# EAGLE board amp_soha (EAGLE 6.4)
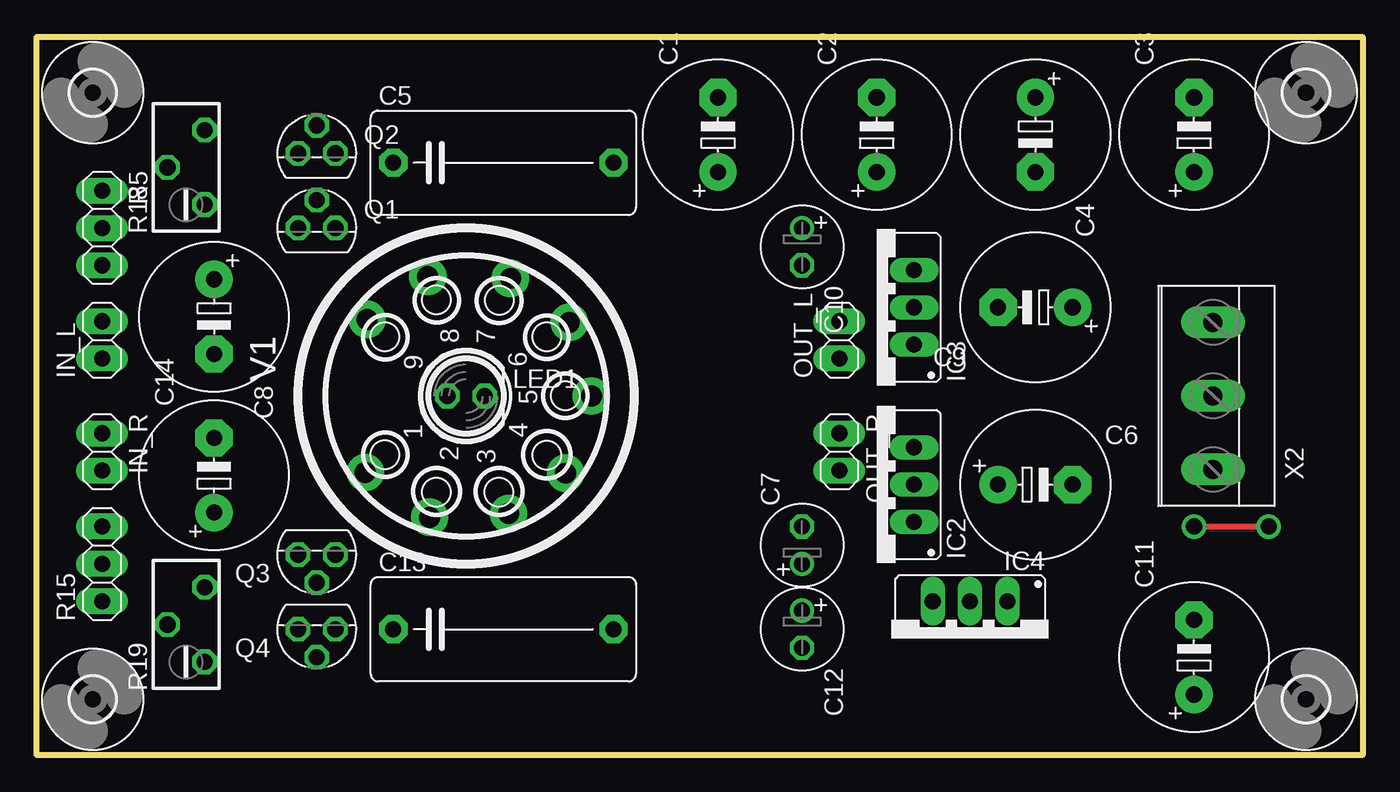
[diagram p0: board, top side]
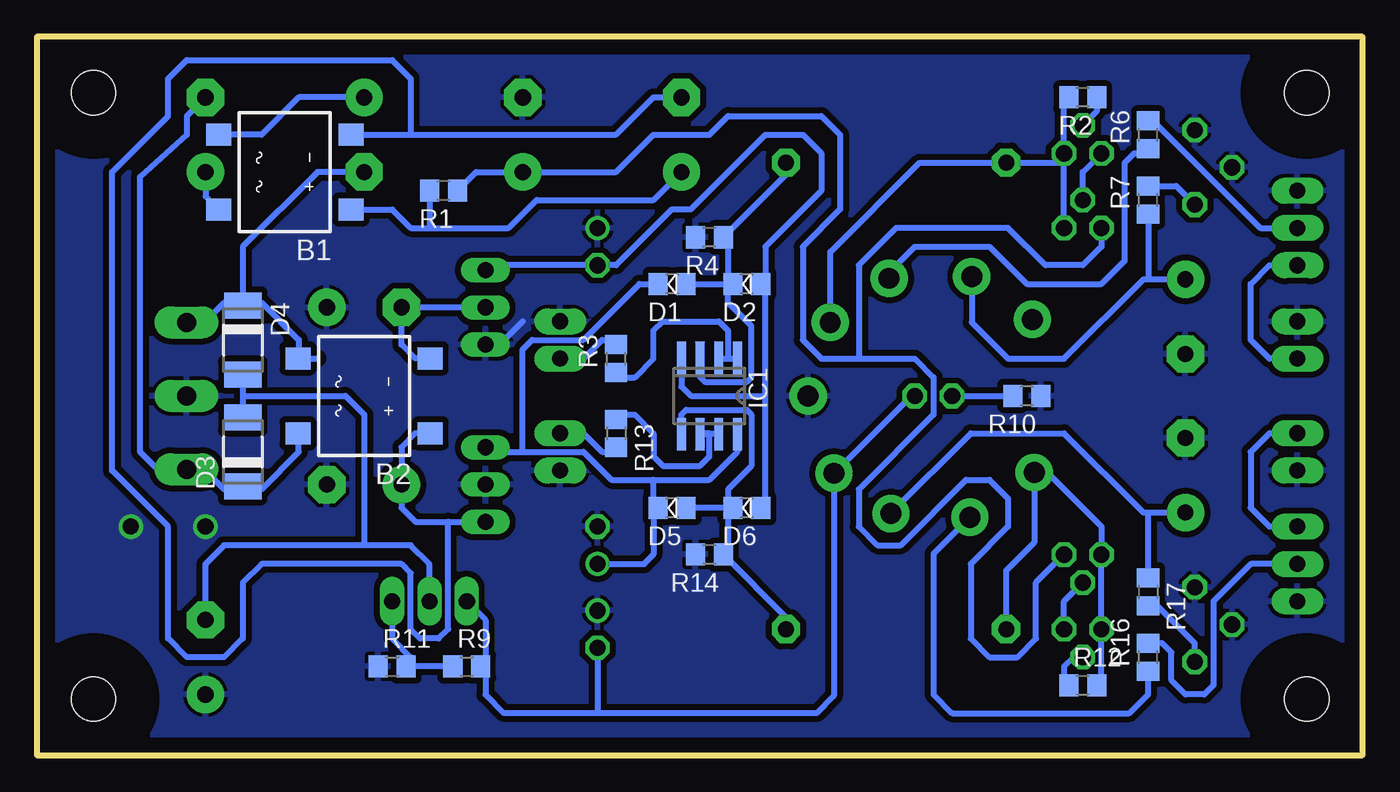
[diagram p1: board, bottom side, seen from below]

Size 90.22 x 48.89 mm. Coordinates in mm from the lower left corner, seen from the top.
Outline: 0,0 0,48.89 90.22,48.89 90.22,0 0,0
Copper layers (1*16): Top 0.035mm / dielectric 1.5mm / Bottom 0.035mm
Design rules "default": minimum track width 10mil, minimum drill 24mil, track to track 8mil, track to pad 8mil, pad to pad 8mil, via to via 8mil, smd to smd 8mil, copper to edge 40mil, drill to drill 8mil, minimum pad ring 10mil, minimum via ring 8mil, stop-mask expansion 4mil, vias tented up to drill 0mil, thermal gap 10mil

## Footprints (pad centres in the part's own frame; a part is rotated, then mirrored left to right if it is on the bottom)
DFS = smd 1.5 x 1.7: + -2.55,-4.5; - 2.55,-4.5; AC1 -2.55,4.5; AC2 2.55,4.5
E5-10,5 = drill 1.1 pad 2.54: + -2.54,0 | drill 1.1 pad 2.54 octagon: - 2.54,0
C150-072X183 = drill 1.1 pad 1.93 octagon: 1 -7.493,0; 2 7.493,0
E2,5-6 = drill 1.1: + -1.27,0 | drill 1.1 pad 1.6 octagon: - 1.27,0
D0805 = smd 1.3 x 1.5: A -0.95,0; K 0.95,0
DO-214AC = smd 1.778 x 2.54: A 2.342,0; C -2.342,0
SO08 = smd 0.6 x 2.2: 1 -1.905,-2.6; 2 -0.635,-2.6; 3 0.635,-2.6; 4 1.905,-2.6; 5 1.905,2.6; 6 0.635,2.6; 7 -0.635,2.6; 8 -1.905,2.6
78XXS = drill 1.1 pad 1.676 long: GND 0,-2.54; IN -2.54,-2.54; OUT 2.54,-2.54
79XXS = drill 1.1 pad 1.676 long: GND -2.54,-2.54; IN 0,-2.54; OUT 2.54,-2.54
337TS = drill 1.1 pad 1.676 long: 1 -2.54,-2.54; 2 0,-2.54; 3 2.54,-2.54
1X02 = drill 1.1 pad 1.778 long: 1 -1.27,0; 2 1.27,0
LED5MM = drill 1.1 pad 1.676 octagon: A -1.27,0; K 1.27,0
TO92 = drill 1.1 pad 1.676 octagon: 1 1.27,0; 2 0,1.905; 3 -1.27,0
R0805 = smd 1.3 x 1.5: 1 -0.95,0; 2 0.95,0
1X03 = drill 1.1 pad 1.778 long: 1 -2.54,0; 2 0,0; 3 2.54,0
RTRIM3296Y = drill 1.1 pad 1.676 octagon: 1 1.27,-2.54; 2 -1.27,0; 3 1.27,2.54
3,0 = hole 3: 0,0
NOVAL = drill 1.422 pad 2.54: 1 5.207,-6.858; 2 8.254,-2.484; 3 8.004,2.893; 4 5.258,6.77; 5 0,8.524; 6 -5.004,7.024; 7 -8.004,3.02; 8 -8.127,-2.611; 9 -5.207,-6.731
W237-103 = drill 1.3 pad 2.184 long: 1 -5,-1.29; 2 0,-1.29; 3 5,-1.29

## Placement (x,y rotation side)
B1  DF01S  [DFS]  73.34,39.69 90 bottom
B2  DF01S  [DFS]  67.94,24.45 90 bottom
C1  100uF/100V  [E5-10,5]  46.35,42.23 90 top
C2  100uF/100V  [E5-10,5]  57.15,42.23 90 top
C3  100uF/100V  [E5-10,5]  78.74,42.23 90 top
C4  100uF/100V  [E5-10,5]  67.94,42.23 270 top
C5  1uF/100V  [C150-072X183]  31.75,40.32 0 top
C6  470uF/35V  [E5-10,5]  67.94,18.41 0 top
C7  47uF/16V  [E2,5-6]  52.07,14.29 90 top
C8  1000uF/10V  [E5-10,5]  12.06,29.84 270 top
C9  470uF/35V  [E5-10,5]  67.94,30.48 180 top
C10  47uF/16V  [E2,5-6]  52.07,34.61 270 top
C11  470uF/35V  [E5-10,5]  78.74,6.67 90 top
C12  47uF/16V  [E2,5-6]  52.07,8.57 270 top
C13  1uF/100V  [C150-072X183]  31.75,8.57 0 top
C14  1000uF/10V  [E5-10,5]  12.06,19.05 90 top
D1  1N4148  [D0805]  46.99,32.07 180 bottom
D2  1N4148  [D0805]  41.91,32.07 180 bottom
D3  ES1  [DO-214AC]  76.2,20.64 90 bottom
D4  ES1  [DO-214AC]  76.2,28.26 270 bottom
D5  1N4148  [D0805]  46.99,16.83 180 bottom
D6  1N4148  [D0805]  41.91,16.83 180 bottom
IC1  NE5535U  [SO08]  44.45,24.45 180 bottom
IC2  7812  [78XXS]  57.15,18.41 90 top
IC3  7912  [79XXS]  57.15,30.48 90 top
IC4  [337TS]  63.5,7.94 180 top
IN_L  [1X02]  4.45,28.26 90 top
IN_R  [1X02]  4.45,20.64 270 top
LED1  [LED5MM]  29.21,24.45 0 top
OUT_L  [1X02]  54.61,28.26 90 top
OUT_R  [1X02]  54.61,20.64 270 top
Q1  J113  [TO92]  19.05,35.88 0 top
Q2  J113  [TO92]  19.05,40.96 0 top
Q3  J113  [TO92]  19.05,13.65 180 top
Q4  J113  [TO92]  19.05,8.57 180 top
R1  2k2  [R0805]  62.55,38.42 180 bottom
R2  360  [R0805]  19.05,44.77 180 bottom
R3  150  [R0805]  50.8,26.99 90 bottom
R4  100k  [R0805]  44.45,35.24 180 bottom
R5  100k  [1X03]  4.45,35.88 270 top
R6  300  [R0805]  14.61,42.23 90 bottom
R7  560  [R0805]  14.61,37.78 90 bottom
R9  1k3  [R0805]  60.96,6.03 0 bottom
R10  [R0805]  22.86,24.45 180 bottom
R11  11k  [R0805]  66.04,6.03 0 bottom
R12  360  [R0805]  19.05,4.76 0 bottom
R13  150  [R0805]  50.8,21.91 270 bottom
R14  100k  [R0805]  44.45,13.65 180 bottom
R15  100k  [1X03]  4.45,13.02 90 top
R16  300  [R0805]  14.61,6.67 90 bottom
R17  560  [R0805]  14.61,11.11 270 bottom
R18  [RTRIM3296Y]  10.16,40.01 0 top
R19  [RTRIM3296Y]  10.16,8.89 0 top
U$1  [3,0]  3.81,3.81 0 top
U$2  [3,0]  3.81,45.09 0 top
U$3  [3,0]  86.36,3.81 0 top
U$4  [3,0]  86.36,45.09 0 top
V1  [NOVAL]  29.21,24.45 270 top
X2  [W237-103]  78.74,24.45 90 top

## Library data of the parts
B1 B2 C1-C14 D1-D6 IC1-IC4 IN_L IN_R LED1 OUT_L OUT_R Q1-Q4 R1-R7 R9-R19 U$1-U$4 V1 X2 = amp_soha

## Nets
+12V: C7.+ D1.K D5.K IC1.8 IC2.OUT
+24V: C2.+ Q1.3 Q3.3 R1.1
-12.6V: C12.- IC4.3 LED1.K R9.2 V1.4
-12V: C10.- D2.A D6.A IC1.4 IC3.OUT
AGND: C2.- C6.- C7.- C8.- C9.+ C10.+ C11.+ C12.+ C14.- IC2.GND IC3.GND IN_L.2 IN_R.2 OUT_L.2 OUT_R.2 R4.2 R5.1 R10.1 R11.1 R14.2 R15.1 R18.2 R18.3 R19.2 R19.3 V1.5 X2.2
N$1: B2.AC1 C3.- D3.C X2.1
N$2: B2.AC2 C4.- D4.C X2.3
N$3: C11.- D3.A D4.A IC4.2
N$4: IC4.1 R9.1 R11.2
N$5: B2.- C9.- IC3.IN
N$6: B1.- B2.+ C1.- C6.+ IC2.IN
N$7: LED1.A R10.2
N$8: B1.AC1 C3.+
N$9: B1.AC2 C4.+
N$10: R16.1 V1.2
N$11: B1.+ C1.+ R1.2
N$12: IN_L.1 R5.3
N$13: R5.2 R6.2
N$14: R6.1 V1.7
N$15: C8.+ R7.1 V1.8
N$16: Q2.2 R2.1
N$17: R7.2 R18.1
N$18: R17.2 R19.1
N$19: C5.1 Q1.1 Q2.1 R2.2 V1.6
N$20: Q1.2 Q2.3
N$22: C5.2 D1.A D2.K IC1.3 R4.1
N$24: IC1.1 IC1.2 R3.1
N$25: OUT_L.1 R3.2
N$26: IN_R.1 R15.3
N$27: R15.2 R16.2
N$29: C14.+ R17.1 V1.3
N$31: C13.1 Q3.1 Q4.1 R12.2 V1.1
N$32: Q4.2 R12.1
N$33: Q3.2 Q4.3
N$34: C13.2 D5.A D6.K IC1.5 R14.1
N$35: IC1.6 IC1.7 R13.1
N$36: OUT_R.1 R13.2

## Tracks (layer width: path | path; a pad name or v marks a point on that pad's centre or on a via)
+12V
  Bottom 0.254: 48.26,16.19 D5.K
  Bottom 0.406: IC1.8 42.55,20.64 44.45,18.73 48.26,18.73 | D5.K 48.26,16.83 | C7.+ 48.9,13.02 48.26,13.65 48.26,16.19 48.26,16.83 | 48.26,16.83 48.26,18.73 | 57.15,20.64 53.02,20.64 51.12,18.73 48.26,18.73 | 57.15,20.64 57.15,27.62 56.52,28.26 53.02,28.26 49.21,32.07 D1.K | IC2.OUT 59.37,20.64 57.15,20.64
+24V
  Bottom 0.406: R1.1 60.33,39.69 C2.+ 50.8,39.69 48.26,42.23 44.45,42.23 43.18,43.5 36.83,43.5 35.56,42.23 35.56,37.15 38.1,34.61 38.1,28.26 36.83,26.99 34.29,26.99 | 34.29,26.99 30.48,26.99 29.21,25.72 29.21,23.18 34.29,18.1 34.29,15.56 33.02,14.29 31.43,14.29 26.99,18.73 25.4,18.73 24.13,17.46 24.13,15.56 26.67,13.02 26.67,7.94 25.4,6.67 23.5,6.67 22.23,7.94 22.23,11.75 Q3.3 | Q1.3 17.78,34.61 19.05,33.34 21.59,33.34 24.13,35.88 31.75,35.88 34.29,33.34 34.29,26.99
-12.6V
  Bottom 0.406: LED1.K 30.72,24.45 V1.4 35.98,4.03 37.15,2.86 52.07,2.86 | 52.07,2.86 58.42,2.86 59.69,4.13 59.69,5.71 R9.2 59.69,6.35 59.69,9.21 IC4.3 | C12.- 52.07,2.86
-12V
  Bottom 0.406: D6.A 40.64,16.83 40.64,24.45 | 40.64,24.45 40.64,31.75 D2.A 40.64,32.39 40.64,34.61 36.83,38.42 36.83,40.96 38.1,42.23 40.64,42.23 45.72,37.15 46.99,37.15 50.8,33.34 C10.- 59.37,33.34 IC3.OUT | IC1.4 46.35,25.08 45.72,24.45 40.64,24.45
AGND  (via drill 1.1 pad 1.68)
  Top 0.406: v78.74,15.56 v83.82,15.56
  Bottom 0.406: IC3.GND 58.74,27.94 57.15,29.53
  pour Bottom (isolate 0.406): -2.54,-2.22 -2.54,51.12 92.71,51.12 92.71,-2.22
N$1
  Bottom 0.406: C3.- 80.01,43.5 80.01,42.23 83.19,39.37 83.19,20.64 82,19.45 X2.1 78.82,19.45 77.47,18.1 76.4,18.1 D3.C 75.13,18.29 74.93,18.1 72.39,20.64 72.39,21.95 B2.AC1
N$2
  Bottom 0.406: 71.13,27 B2.AC2 72.39,26.94 72.39,28.26 74.93,30.8 76.2,30.8 D4.C | C4.- 71.12,39.69 76.2,34.61 D4.C | X2.3 78.82,29.45 77.47,30.8 76.4,30.8 D4.C
N$3
  Bottom 0.406: 76.2,24.45 D3.A | D4.A 76.2,24.45 | 76.2,24.45 69.22,24.45 67.94,23.18 67.94,14.29 | 67.94,14.29 77.47,14.29 78.74,13.02 C11.- | IC4.2 63.5,13.02 64.77,14.29 67.94,14.29
N$4
  Bottom 0.406: R9.1 R11.2 64.77,6.35 64.77,6.67 66.04,7.94 IC4.1
N$5
  Bottom 0.406: IC3.IN C9.- 65.41,27.94 64.46,27 B2.-
N$6
  Bottom 0.406: B2.+ 64.46,21.9 65.41,20.95 C6.+ 65.41,16.83 64.45,15.88 62.23,15.88 | 62.23,15.88 IC2.IN | B1.- 64.77,42.24 | 64.77,42.24 50.79,42.24 48.26,44.77 C1.- | 64.77,42.24 64.77,46.04 66.04,47.31 80.01,47.31 81.28,46.04 81.28,43.5 85.09,39.69 85.09,19.37 81.28,15.56 81.28,7.94 80.01,6.67 77.47,6.67 76.2,7.94 76.2,11.75 74.93,13.02 65.41,13.02 64.77,12.38 64.77,8.57 64.14,7.94 62.87,7.94 62.23,8.57 62.23,15.88
N$7
  Bottom 0.406: LED1.A R10.2
N$8
  Bottom 0.406: C3.+ 78.74,38.03 B1.AC1
N$9
  Bottom 0.406: C4.+ 72.39,44.77 74.93,42.23 B1.AC2
N$10
  Bottom 0.406: V1.2 29.21,13.71 29.21,4.13 27.94,2.86 15.88,2.86 14.61,4.13 R16.1
N$11
  Bottom 0.406: B1.+ 66.03,37.14 64.77,35.88 63.5,35.88 | 63.5,35.88 58.1,35.88 56.2,37.78 48.26,37.78 C1.+ | R1.2 63.5,35.88
N$12
  Bottom 0.406: IN_L.1 6.35,26.99 7.62,28.26 7.62,32.07 6.35,33.34 R5.3
N$13
  Bottom 0.406: R6.2 14.29,43.18 6.99,35.88 R5.2
N$14
  Bottom 0.406: V1.7 32.23,32.86 30.48,34.61 25.4,34.61 22.86,32.07 17.78,32.07 16.19,33.66 16.19,40.32 15.56,40.96 14.93,40.96 R6.1
N$15
  Bottom 0.406: V1.8 26.6,29.46 24.13,26.99 20.32,26.99 14.92,32.38 14.61,32.38 | C8.+ 14.61,32.38 | R7.1 14.61,32.38
N$16
  Bottom 0.406: R2.1 18.1,43.81 Q2.2
N$17
  Bottom 0.406: R7.2 12.7,38.73 R18.1
N$18
  Bottom 0.406: R19.1 11.43,7.62 13.97,10.16 R17.2
N$19
  Bottom 0.406: Q1.1 20.32,40.32 | 20.32,40.32 Q2.1 20.32,44.77 R2.2 | V1.6 36.23,34.25 30.16,40.32 C5.1 20.32,40.32
N$20
  Bottom 0.406: Q1.2 19.05,39.69 Q2.3
N$22
  Bottom 0.254: 45.09,27.62 IC1.3 | 43.81,35.24 R4.1
  Bottom 0.406: 45.09,27.62 45.09,25.72 44.77,25.4 41.91,25.4 41.59,25.72 41.59,29.21 43.18,30.8 43.18,31.75 D2.K | D1.A D2.K | D2.K 43.18,32.39 43.18,35.24 R4.1 39.24,39.5 C5.2
N$24
  Bottom 0.406: R3.1 50.8,25.72 49.53,25.72 48.26,26.99 48.26,28.89 47.62,29.53 43.81,29.53 43.18,28.89 43.18,26.99 | IC1.2 arc-90 43.76,26.99 43.18,26.99 | 43.18,26.99 42.6,26.99 arc-90 IC1.1
N$25
  Bottom 0.406: OUT_L.1 53.02,26.99 51.75,28.26 51.12,28.26 R3.2
N$26
  Bottom 0.406: IN_R.1 6.35,21.91 7.62,20.64 7.62,16.83 6.35,15.56 R15.3
N$27
  Bottom 0.406: R16.2 13.65,7.62 13.02,6.99 13.02,5.08 12.06,4.13 10.79,4.13 10.16,4.76 10.16,10.48 7.62,13.02 R15.2
N$29
  Bottom 0.406: V1.3 32.1,16.47 26.67,21.91 20.32,21.91 14.92,16.51 14.61,16.51 | 14.61,16.51 C14.+ | R17.1 14.61,16.51
N$31
  Bottom 0.406: R12.2 17.78,4.76 Q4.1 Q3.1 17.78,15.56 21.46,19.24 V1.1 22.35,14.48 24.26,12.57 C13.1
N$32
  Bottom 0.406: Q4.2 19.68,6.67 20.32,6.03 20.32,5.08 R12.1
N$33
  Bottom 0.406: Q4.3 20.32,10.48 Q3.2
N$34
  Bottom 0.406: 43.18,16.83 D5.A | IC1.5 46.35,23.18 46.04,23.5 41.91,23.5 41.59,23.18 41.59,19.68 43.18,18.1 43.18,16.83 D6.K 43.18,16.83 | 43.18,16.83 43.18,13.97 R14.1 39.24,9.4 C13.2
N$35
  Bottom 0.254: 43.81,21.27 IC1.7 | 45.09,21.27 IC1.6
  Bottom 0.406: R13.1 50.8,23.18 49.53,23.18 48.26,21.91 48.26,20.32 47.62,19.68 45.09,19.68 44.45,20.32 44.45,21.91 | 44.45,21.91 45.02,21.91 IC1.6 44.51,21.85 44.45,21.91 | 44.45,21.91 43.88,21.91 IC1.7
N$36
  Bottom 0.406: 50.8,20.64 R13.2 51.12,20.64 51.75,20.64 53.02,21.91 OUT_R.1